# Altium PCB Pwr_PCB2.PcbDoc
Units mil, origin at the board's own origin, x right, y up, seen from the top; angles counter-clockwise.
Board outline 4800 x 4010 mil, 2 copper layers (Top Layer, Bottom Layer), stack 61.756 mil thick; 62 components, 21 nets, 142 pads, 19 vias.
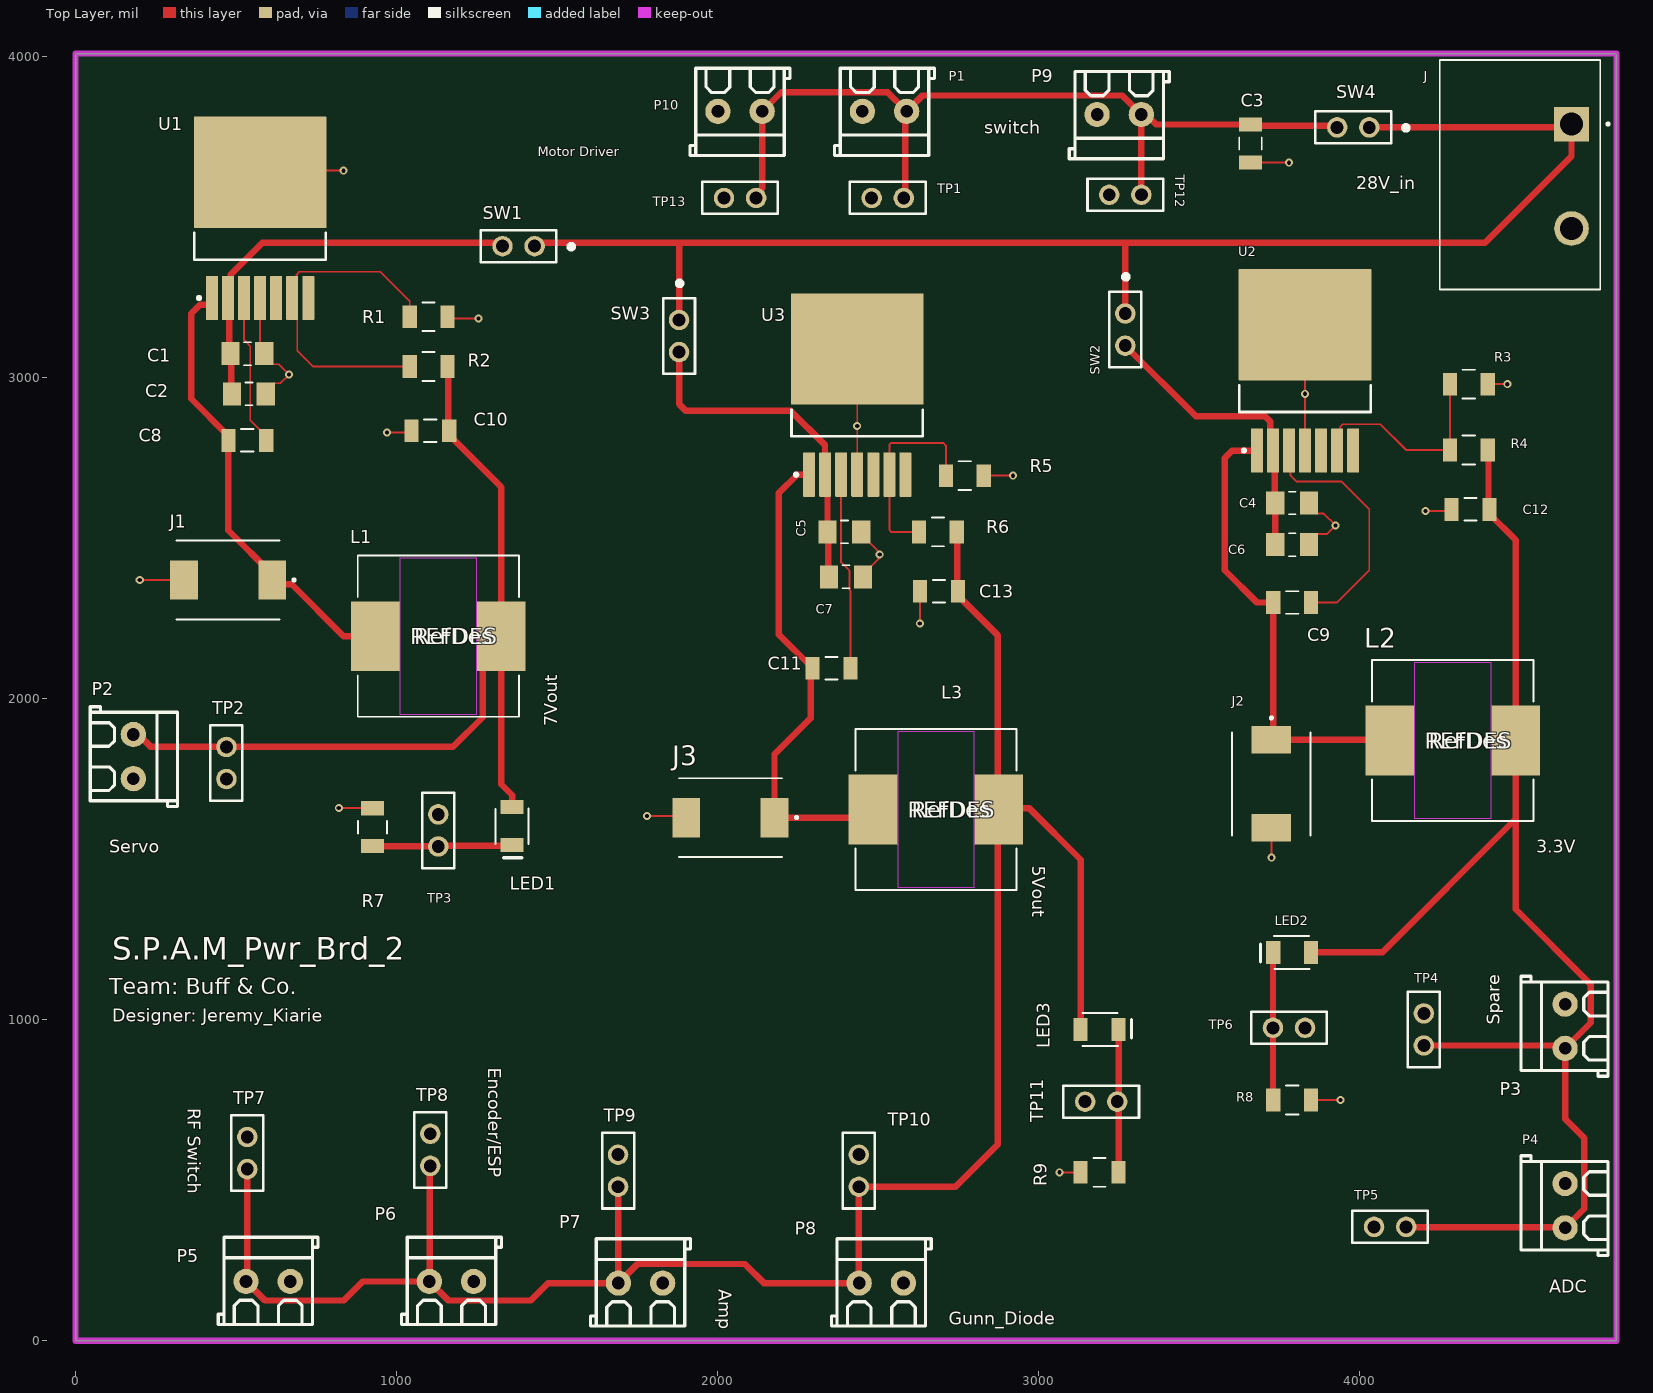
[diagram p0: Top Layer view]
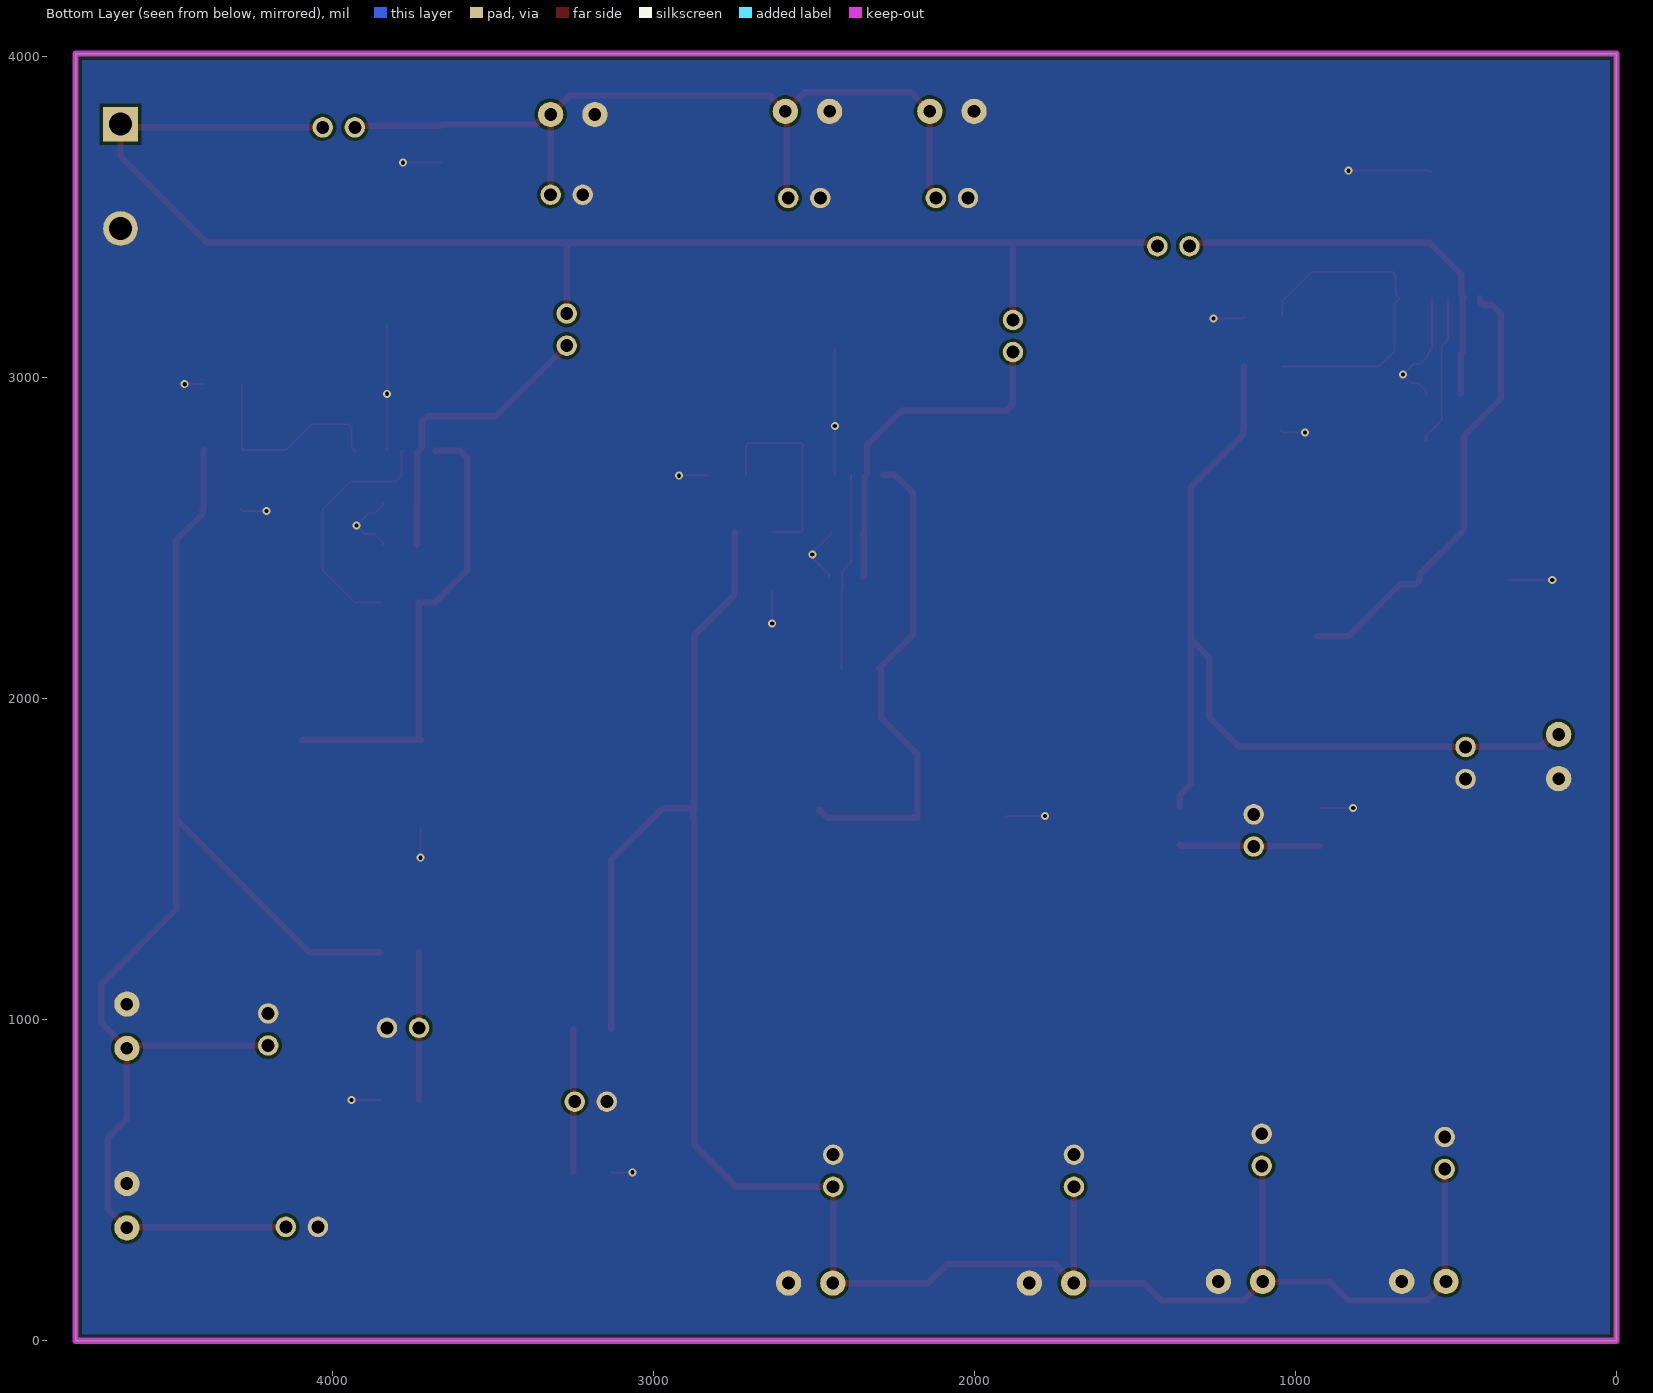
[diagram p1: Bottom Layer view, seen from below]
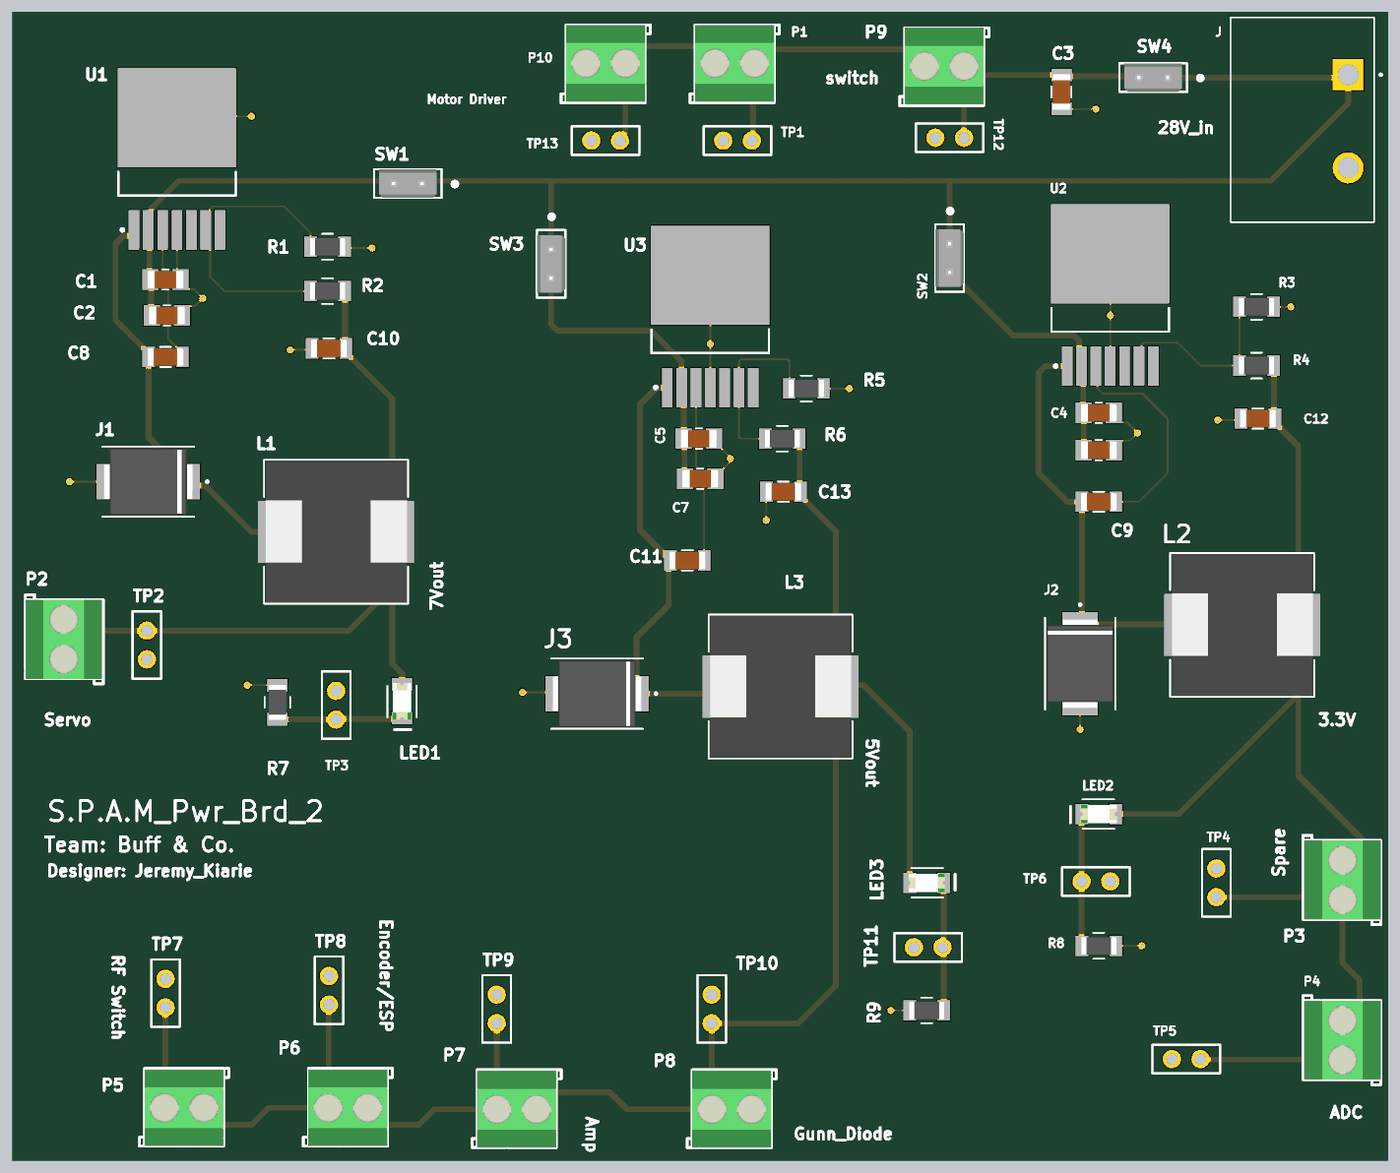
[diagram p2: 3D render of the assembled board from above, using the file's embedded part models]

## Layer stack, top to bottom
Top Solder: solder mask 1, SM-001, Dk 4
Top Layer: signal copper 1.378
Dielectric 1: core 59, Core-043, Dk 4.3
Bottom Layer: signal copper 1.378
Bottom Solder: solder mask 1, SM-001, Dk 4

## Board outline
0,0 4800,0 4800,4010 0,4010

## Design rules (kind name [scope] priority, off if disabled: settings)
Clearance [All] p1: gap=10 ignorepadtopadclearanceinfootprint=FALSE
PlaneClearance [All] p1: clearance=10
PlaneConnect [All] p1: planeconnectstyle=Direct reliefexpansion=20 reliefentries=4 reliefconductorwidth=10 reliefairgap=10
PolygonConnect [All] p1: connectstyle=Direct reliefconductorwidth=10 reliefentries=4 polygonreliefangle="90 Angle" airgapwidth=10
RoutingVias [All] p1: holewidth=13 width=25 viastyle="Through Hole" minholewidth=13 minwidth=25 maxholewidth=60 maxwidth=80
SolderMaskExpansion [All] p1: expansion=4 istentingtop=FALSE
SupplyNets "Schematic Supply Nets" [InNet('GND')] p1: voltage=0.000
UnRoutedNet [All] p1: checkbadconnections=TRUE
Width "Schematic Width Constraint_13" [InNet('NetLED1_2')] p1: maxlimit=100 minlimit=10 preferedwidth=20 minimp=50.000000 maximp=50.000000 favimp=50.000000
Width "Schematic Width Constraint_12" [InNet('NetLED3_2')] p2: maxlimit=100 minlimit=10 preferedwidth=20 minimp=50.000000 maximp=50.000000 favimp=50.000000
Width "Schematic Width Constraint_11" [InNet('NetLED2_2')] p3: maxlimit=100 minlimit=10 preferedwidth=20 minimp=50.000000 maximp=50.000000 favimp=50.000000
Width "Schematic Width Constraint_10" [InNet('NetC11_1')] p4: maxlimit=100 minlimit=10 preferedwidth=20 minimp=50.000000 maximp=50.000000 favimp=50.000000
Width "Schematic Width Constraint_9" [InNet('NetC8_1')] p5: maxlimit=100 minlimit=10 preferedwidth=20 minimp=50.000000 maximp=50.000000 favimp=50.000000
Width "Schematic Width Constraint_8" [InNet('NetC13_2')] p6: maxlimit=100 minlimit=10 preferedwidth=20 minimp=50.000000 maximp=50.000000 favimp=50.000000
Width "Schematic Width Constraint_7" [InNet('NetC12_2')] p7: maxlimit=100 minlimit=10 preferedwidth=20 minimp=50.000000 maximp=50.000000 favimp=50.000000
Width "Schematic Width Constraint_6" [InNet('NetC9_1')] p8: maxlimit=100 minlimit=10 preferedwidth=20 minimp=50.000000 maximp=50.000000 favimp=50.000000
Width "Schematic Width Constraint_5" [InNet('NetC10_2')] p9: maxlimit=100 minlimit=10 preferedwidth=20 minimp=50.000000 maximp=50.000000 favimp=50.000000
Width "Schematic Width Constraint" [InNet('NetC3_1')] p10: maxlimit=100 minlimit=10 preferedwidth=20 minimp=50.000000 maximp=50.000000 favimp=50.000000
Width "Schematic Width Constraint_4" [InNet('NetC4_2')] p11: maxlimit=100 minlimit=10 preferedwidth=20 minimp=50.000000 maximp=50.000000 favimp=50.000000
Width "Schematic Width Constraint_3" [InNet('+24V')] p12: maxlimit=100 minlimit=10 preferedwidth=20 minimp=50.000000 maximp=50.000000 favimp=50.000000
Width "Schematic Width Constraint_2" [InNet('NetC5_2')] p13: maxlimit=100 minlimit=10 preferedwidth=20 minimp=50.000000 maximp=50.000000 favimp=50.000000
Width "Schematic Width Constraint_1" [InNet('NetC1_2')] p14: maxlimit=100 minlimit=10 preferedwidth=20 minimp=50.000000 maximp=50.000000 favimp=50.000000
Width [All] p15: maxlimit=10 minlimit=6 preferedwidth=6 minimp=50.000000 maximp=50.000000 favimp=50.000000
27 further rules are at their usual default settings.

## Components (designator, comment, footprint, x,y, rotation, side; value= is the part's Value field where it differs from the comment)
C1 "C3216X5R1E336M160AC" CAPC3216X180N 535,3075 r180 top
C2 "C3216X5R1E336M160AC" CAPC3216X180N 540,2950 r180 top
C3 "22uF" 1206_Passive_Capacitor 3660,3730 r270 top
C4 "C3216X5R1E336M160AC" CAPC3216X180N 3790,2610 r180 top
C5 "C3216X5R1E336M160AC" CAPC3216X180N 2395,2520 r180 top
C6 "C3216X5R1E336M160AC" CAPC3216X180N 3790,2480 r180 top
C7 "C3216X5R1E336M160AC" CAPC3216X180N 2400,2380 r180 top
C8 "10nF" 1206_Passive_Capacitor 535,2805 r0 top
C9 "10nF" 1206_Passive_Capacitor 3790,2300 r0 top
C10 "22uF" 1206_Passive_Capacitor 1105,2835 r0 top
C11 "10nF" 1206_Passive_Capacitor 2355,2095 r0 top
C12 "22uF" 1206_Passive_Capacitor 4345,2590 r0 top
C13 "22uF" 1206_Passive_Capacitor 2690,2335 r0 top
J "4DB-P108-02" TE_2-1437667-4 4660,3790 r270 top
J1 "SL44-E3/57T" DIOM7959X262N 475,2370 r180 top
J2 "SL44-E3/57T" DIOM7959X262N 3725,1735 r270 top
J3 "SL44-E3/57T" DIOM7959X262N 2040,1630 r180 top
L1 "DR127-220-R" DR127 1130,2195 r0 top
L2 "DR127-220-R" DR127 4290,1870 r0 top
L3 "DR127-220-R" DR127 2680,1655 r0 top
LED1 "Red" LED_1206 1360,1604 r270 top
LED2 "Red" LED_1206 3790,1210 r180 top
LED3 "Red" LED_1206 3190,970 r0 top
P1 "2P Screw Terminal Block" "P_Terminal block 3.5mm-pitch" 2520,3830 r180 top
P2 "2P Screw Terminal Block" "P_Terminal block 3.5mm-pitch" 180,1820 r270 top
P3 "2P Screw Terminal Block" "P_Terminal block 3.5mm-pitch" 4640,980 r90 top
P4 "2P Screw Terminal Block" "P_Terminal block 3.5mm-pitch" 4640,421.1 r90 top
P5 "2P Screw Terminal Block" "P_Terminal block 3.5mm-pitch" 600,185 r0 top
P6 "2P Screw Terminal Block" "P_Terminal block 3.5mm-pitch" 1171.1,185 r0 top
P7 "2P Screw Terminal Block" "P_Terminal block 3.5mm-pitch" 1760,180 r0 top
P8 "2P Screw Terminal Block" "P_Terminal block 3.5mm-pitch" 2510,180 r0 top
P9 "2P Screw Terminal Block" "P_Terminal block 3.5mm-pitch" 3251.1,3820 r180 top
P10 "2P Screw Terminal Block" "P_Terminal block 3.5mm-pitch" 2070,3830 r180 top
R1 "1k" 1206_Passive_Resitor 1100,3190 r0 top value="1K Ohm"
R2 "1K" 1206_Passive_Resitor 1100,3035 r0 top value="4.75K Ohm"
R3 "1k" 1206_Passive_Resitor 4340,2980 r0 top value="1K Ohm"
R4 "1k" 1206_Passive_Resitor 4340,2775 r0 top value="1.72K Ohm"
R5 "1k" 1206_Passive_Resitor 2770,2695 r0 top value="1K Ohm"
R6 "1k" 1206_Passive_Resitor 2686,2520 r0 top value="3.16K Ohm"
R7 "1k" 1206_Passive_Resitor 925,1600 r90 top value="1K Ohm"
R8 "1k" 1206_Passive_Resitor 3790,750 r0 top value="1K Ohm"
R9 "1k" 1206_Passive_Resitor 3190,525 r180 top value="1K Ohm"
SW1 "SW_2Pin_100mil_Switch" 2Pin-Header-Conn 1430,3410 r180 top
SW2 "SW_2Pin_100mil_Switch" 2Pin-Header-Conn 3270,3200 r270 top
SW3 "SW_2Pin_100mil_Switch" 2Pin-Header-Conn 1880,3180 r270 top
SW4 "SW_2Pin_100mil_Switch" 2Pin-Header-Conn 4030,3780 r180 top
TP1 "10x Probe TP" TP_Diff_Probe 2580,3560 r180 top
TP2 "10x Probe TP" TP_Diff_Probe 470,1850 r270 top
TP3 "10x Probe TP" TP_Diff_Probe 1130,1540 r90 top
TP4 "10x Probe TP" TP_Diff_Probe 4200,920 r90 top
TP5 "10x Probe TP" TP_Diff_Probe 4145,355 r180 top
TP6 "10x Probe TP" TP_Diff_Probe 3730,975 r0 top
TP7 "10x Probe TP" TP_Diff_Probe 535,535 r90 top
TP8 "10x Probe TP" TP_Diff_Probe 1105,545 r90 top
TP9 "10x Probe TP" TP_Diff_Probe 1690,480 r90 top
TP10 "10x Probe TP" TP_Diff_Probe 2440,480 r90 top
TP11 "10x Probe TP" TP_Diff_Probe 3245,745 r180 top
TP12 "10x Probe TP" TP_Diff_Probe 3320,3570 r180 top
TP13 "10x Probe TP" TP_Diff_Probe 2120,3560 r180 top
U1 "LM2678S-ADJ/NOPB" KTW0007B_N 575,3496.3 r90 top
U2 "LM2678S-ADJ/NOPB" KTW0007B_N 3830,3021.3 r90 top
U3 "LM2678S-ADJ/NOPB" KTW0007B_N 2435,2946.3 r90 top

## Footprints (in the part's own frame and the unit in brackets; to place one, negate y for a bottom-side part, rotate by r counter-clockwise, add the part's x,y. Pads: shape width x height; smd on the part's side, far side on the other; paste and mask are expansions set on the pad)
2Pin-Header-Conn [mm]
  round 1.62 hole 1.02: 1(0,0) 2(2.54,0)
  silkscreen extent -3.03,-1.27 4.26,1.26, body extent -1.27,-1.27 3.81,1.27, height 8.13
1206_Passive_Capacitor [mil]
  rect 44x71 smd: 1(-59,0) 2(59,0)
  silkscreen extent -19,-35 19,35, body extent -63,-31 63,32, height 50
1206_Passive_Resitor [mil]
  rect 44x71 smd: 1(-59,0) 2(59,0)
  silkscreen extent -19,-45 19,45, body extent -61,-31 61,31, height 26
CAPC3216X180N [mm]
  rect 1.44x1.82 smd: 1(-1.336,0) 2(1.336,0)
  silkscreen extent -0.29,-0.9 0.29,0.9, body extent -1.6,-0.8 1.6,0.8, height 1.8
DIOM7959X262N [mm]
  rect 2.18x3.12 smd: A(3.485,0) C(-3.485,0)
  silkscreen extent -5.32,-3.11 4.07,3.11, body extent -3.97,-2.96 3.97,2.96, height 2.62
DR127 [mil]
  rect 152x217 smd paste+0 mask+0: 1(-196,0) 2(196,0)
  Top Layer keep-out region: -118,-244 -118,244 118,244 118,-244
  silkscreen extent -251,-251 251,251, body extent -245,-245 247,247, height 315
KTW0007B_N [mm] "DPAK, 7-Leads, Body 9.4x10.4mm, Pitch 1.27mm, IPC Medium Density"
  rrect11% 3.5x0.95 smd: 1(-6.3,3.81) 2(-6.3,2.54) 3(-6.3,1.27) 4(-6.3,0) 5(-6.3,-1.27) 6(-6.3,-2.54) 7(-6.3,-3.81)
  rrect1% 8.8x10.5 smd: 8(3.65,0)
  silkscreen extent -6.42,-5.2 -1.15,5.2, body extent -3.25,-5.2 6.15,5.2, height 4.65
LED_1206 [mil]
  rect 44x71 smd: 1(-59,0) 2(59,0)
  silkscreen extent -54,-51 99,51, body extent -63,-31 63,31, height 28
"P_Terminal block 3.5mm-pitch" [mm]
  round 2 hole 1: 1(-1.75,0) 2(1.75,0)
  silkscreen extent -3.95,-3.4 3.95,3.5, body extent -3.5,-3.4 3.5,3.4, height 8.4
TE_2-1437667-4 [mil]
  rect 108x108 hole 72: 1(0,0)
  round 108 hole 72: 2(325,0)
  silkscreen extent -200,-410 515,118
TP_Diff_Probe [mm]
  round 1.62 hole 1.02: 1(0,0) 2(2.54,0)
  silkscreen extent -1.72,-1.27 4.26,1.26

## Part data
C1 C2 C4 C5 C6 C7: "Cap Ceramic 33uF 25V X5R 20% Pad SMD 1206 85Â°C Low ESR T/R", Package="3216 TDK", Check_prices=https://www.snapeda.com/parts/C3216X5R1E336M160AC/TDK/view-part/?ref=eda, MF="TDK Electronics", MP=C3216X5R1E336M160AC, SnapEDA_Link=https://www.snapeda.com/parts/C3216X5R1E336M160AC/TDK/view-part/?ref=snap
C3 C10 C12 C13: library part C_22uF_1206, "22uF ±10% 25V X5R 1206 Multilayer Ceramic Capacitors MLCC - SMD/SMT RoHS", LCSC Part#=C12891, MFR Part #=CL31A226KAHNNNE, Datasheet=https://datasheet.lcsc.com/lcsc/1811031514_Samsung-Electro-Mechanics-CL31A226KAHNNNE_C12891.pdf, Type=basic
C8 C9 C11: library part C_10nF_1206, "10nF 50V X7R ±10% 1206 Multilayer Ceramic Capacitors MLCC - SMD/SMT ROHS", LCSC Part#=C1848, MFR Part #=CL31B105KBHNNNE, Digikey Link=https://www.digikey.com/product-detail/en/C1206C105M4RACTU/399-8150-1-ND/3471873/?itemSeq=304982366, Type=Basic
J: "Conn; Term Strip; Barrier; 2Pole; 8.26mmPitch; SnglRow; 22-12; Series 4DB; 20A; 150V", Package=None, Availability=Unavailable, MF="TE Connectivity", MP=4DB-P108-02, Price=None, SnapEDA_Link=https://www.snapeda.com/parts/4DB-P108-02/TE%20Connectivity%20AMP%20Connectors/view-part/2743721/?ref=snap, TE_purchase_URL=https://www.te.com/usa-en/product-2-1437667-4.html?te_bu=Cor&te_type=disp&te_campaign=seda_glo_cor-seda-global-disp-prtnr-fy19-seda-model-bom-cta_sma-317_1&elqCampaignId=32493
J1 J2 J3: "Diode Schottky 40 V 4A Surface Mount DO-214AB (SMC)", Package="DO-214 Vishay", Check_prices=https://www.snapeda.com/parts/SL44-E3/57T/Vishay/view-part/?ref=eda, MF="Vishay Semiconductor", MP=SL44-E3/57T, SnapEDA_Link=https://www.snapeda.com/parts/SL44-E3/57T/Vishay/view-part/?ref=snap
L1 L2 L3: "Description", Manufacturer_Name=Eaton, Copyright="Copyright (C) 2025 Ultra Librarian. All rights reserved.", Manufacturer_Part_Number=DR127-220-R
LED1 LED2 LED3: library part LED_RED_1206, "Red 621~631nm 1206 Light Emitting Diodes (LED) RoHS", LCSC Part#=C93133, MFR Part #=15-21/R6C-FQ1R1B/2T, Datasheet=https://datasheet.lcsc.com/szlcsc/1811151241_Everlight-Elec-15-21-R6C-FQ1R1B-2T_C93133.pdf, Type=Extended
P1 P2 P3 P4 P5 P6 P7 P8 P9 P10: library part "P_Terminal block", "Green Straight pin 3.5mm  pitch; P=3.5mm  Screw terminal ROHS", LCSC Part#=C474892, Manufacturer="Cixi Kefa Elec", MFR Part #=KF350-3.5-2P, Datasheet=https://datasheet.lcsc.com/lcsc/2001160007_Cixi-Kefa-Elec-KF350-3-5-2P_C474892.pdf
R1 R2 R3 R4 R5 R6 R7 R8 R9: library part R_1K_1206, "CHIP RESISTOR - SURFACE MOUNT 1KOHMS ±1% 1/4W 1206 ROHS", LCSC Part#=C4410, MFR Part #=RNCP1206FTD1K00CT, Digikey Link=https://www.digikey.com/product-detail/en/RNCP1206FTD1K00/RNCP1206FTD1K00CT-ND/2240675/?itemSeq=304982373, Type=Basic
SW1 SW2 SW3 SW4: "2Pin Header", LCSC Part#=C124375, Type=Extended
TP1 TP2 TP3 TP4 TP5 TP6 TP7 TP8 TP9 TP10 TP11 TP12 TP13: library part TP_Diff_Probe, "Test Point 300 mil centers"
U1 U2 U3: library part CMP-0069-00191-3, "SIMPLE SWITCHER® High Efficiency 5A Step-Down Voltage Regulator, 7-pin TO-263, Pb-Free", Manufacturer="Texas Instruments", PackageTopMarking=NSUZXYTTE#*LM2678*S-ADJ, PowerWise=N, Code_JEDEC=MO-169-AC, ComponentLink1Description="Datasheet URL", ComponentLink1URL=http://www.ti.com/general/docs/lit/getliterature.tsp?genericPartNumber=LM2678&fileType=pdf, CompType=Switcher, PackageDescription="TO-263, Molded, .400 x .390 x .180in Body, 7 Lead, .050in Pitch, Surface Mount", PackageReference=KTW0007B, PinCount=7, RoHS=Y

## Via types
v1: diameter 25, hole 13, Top Layer to Bottom Layer, 19 vias

## Nets (pads, with @x,y where several pads share a name; then routed paths per layer and width w, separated by ;. In a path a pad name is that pad's centre, name@x,y a point inside that pad or via, vN(x,y) a via of type N, cw(c..) or ccw(c..) an arc to the next point about the centre after c; other vN are vias at no path point)
+24V: J.1 SW1.1 SW2.1 SW3.1 SW4.1 | length 4536
  Top Layer w20: SW1.1@1430,3420 1880,3420 ; SW3.1 1880,3420 ; SW2.1 3270,3420 ; SW4.1 4650,3780 J.1 4660,3690 4390,3420 3270,3420 ; 1880,3420 3270,3420
GND: C1.1 C2.1 C3.2 C4.1 C5.1 C6.1 C7.1 C10.1 C12.1 C13.1 J1.A J2.A J3.A J.2 P1.2 P2.2 P3.2 P4.2 P5.2 P6.2 P7.2 P8.2 P9.2 P10.2 R1.2 R3.2 R5.2 R7.2 R8.2 R9.2 TP1.2 TP2.2 TP3.2 TP4.2 TP5.2 TP6.2 TP7.2 TP8.2 TP9.2 TP10.2 TP11.2 TP12.2 TP13.2 U1.4 U1.8 U2.4 U2.8 U3.4 U3.8 | length 3097.3
  Top Layer w6: v1(200,2370) J1.A ; U1.4 575,3087.6 C1.1 587.6,3067.52 612.94,3042.17 632.83,3042.17 v1(665,3010) 637.83,2982.83 617.94,2982.83 592.6,2957.48 C2.1 ; U1.8 580,3645 v1(835,3645) ; v1(820,1660) 924,1660 R7.2 ; v1(970,2830) 1041,2830 C10.1 ; R1.2 1164,3185 v1(1255,3185) ; v1(1780,1635) 1897.8,1635 J3.A ; U3.4 v1(2435,2850) U3.8 ; C5.1 2447.6,2512.52 2505,2455.12 v1(2505,2450) 2501.36,2446.36 2501.36,2436.25 2452.6,2387.48 C7.1 ; v1(2630,2235) 2630,2334 C13.1 ; R5.2 v1(2920,2695) ; v1(3065,525) R9.2 ; C3.2 3660.64,3670.36 v1@3779.36,3670.36 ; v1(3725,1505) J2.A ; v1@3779.36,3669.36 v1(3780,3670) ; U2.4 v1(3830,2950) U2.8 ; C6.1 3842.6,2487.48 3867.94,2512.83 3897.83,2512.83 v1(3925,2540) 3887.83,2577.17 3867.94,2577.17 3842.6,2602.52 C4.1 ; R8.2 v1(3940,750) ; v1(4205,2585) 4281,2585 C12.1 ; R3.2 v1(4460,2980)
NetC1_2: C1.2 C2.2 SW1.2 U1.2 | length 1267.4
  Top Layer w20: C2.2 484.9,2952.5 484.9,3072.5 C1.2 478.7,3078.7 478.7,3244.57 U1.2 483.7,3256.97 483.7,3321.65 582.06,3420 SW1.2@1330,3420
NetC3_1: C3.1 P1.1 P9.1 P10.1 SW4.2 TP1.1 TP12.1 TP13.1 | length 2703.4
  Top Layer w20: TP13.1 2120,3571.85 2138.9,3590.74 P10.1 2198.27,3889.37 2529.53,3889.37 P1.1 ; TP1.1 2584.45,3564.45 2584.45,3825.55 P1.1 ; TP12.1 P9.1 ; SW4.2 3925.5,3784.5 3664.5,3784.5 C3.1 3366.9,3789 3335.9,3820 P9.1 ; P1.1 2638.27,3879.37 3260.63,3879.37 P9.1
NetC4_2: C4.2 C6.2 SW2.2 U2.2 | length 939.5
  Top Layer w20: SW2.2 3490,2880 3705,2880 3721.3,2863.7 3721.3,2781.97 U2.2 3735.84,2767.43 3735.84,2611.56 C4.2 C6.2
NetC5_2: C5.2 C7.2 SW3.2 U3.2 | length 1084
  Top Layer w20: SW3.2 1880,2918.49 1901.72,2896.77 2228.23,2896.77 2334.61,2790.39 U3.2@2334.61,2698.66 ; U3.2@2335.26,2698.01 2342.4,2690.87 C5.2 2344.9,2517.5 2344.9,2382.5 C7.2
NetC8_1: C8.1 J1.C L1.1 U1.1 | length 1411.3
  Top Layer w20: U1.1 425,3236.72 416.3,3228.02 388.02,3228.02 360,3200 360,2934.5 476,2818.5 C8.1 476,2524.71 612.2,2388.5 J1.C@612.2,2379.25 ; J1.C 625.61,2356.6 673.4,2356.6 835,2195 L1.1
NetC8_2: C8.2 U1.3 | length 471.8
  Top Layer w6: U1.3 525,3117.79 544.25,3098.54 544.25,2868.25 C8.2@594,2818.5
  Top Layer w10: C8.2 C8.2@594,2818.5
NetC9_1: C9.1 J2.C L2.1 U2.1 | length 1452.3
  Top Layer w20: U2.1 3603.27,2773.27 3580,2750 3580,2400 3680,2300 C9.1 3731,1878.2 J2.C 4091.8,1872.2 L2.1
NetC9_2: C9.2 U2.3 | length 781.3
  Top Layer w6: U2.3@3784.77,2768.5 3784.77,2695.23 3803,2677 3943,2677 4030,2590 4030,2400 3930,2300 C9.2
  Top Layer w10: U2.3 U2.3@3784.77,2768.5
NetC10_2: C10.2 L1.2 LED1.1 P2.1 R2.2 TP2.1 | length 2856.6
  Top Layer w20: P2.1 195.89,1888.9 234.79,1850 TP2.1 1175.28,1850 1268,1942.72 1268,2128 L1.2@1320,2180 ; R2.2 1161.5,3032.5 1161.5,2837.5 C10.2 1164,2821.5 1326,2659.5 L1.2 1326,2180 1326,1734 1360,1700 LED1.1
NetC11_1: C11.1 J3.C L3.1 U3.1 | length 1539.4
  Top Layer w20: U3.1 2284.75,2698.01 2248.01,2698.01 2190,2640 2190,2201 C11.1 2290,2089 2290,1940 2177.2,1827.2 J3.C 2459,1630 L3.1
NetC11_2: C11.2 U3.3 | length 615.3
  Top Layer w6: U3.3 2385,2424.96 2411.25,2398.71 2411.25,2338.79 2414,2336.04 C11.2
NetC12_2: C12.2 L2.2 LED2.1 P3.1 P4.1 R4.2 TP4.1 TP5.1 | length 4378.7
  Top Layer w20: LED2.1 4070,1210 4480,1620 ; TP5.1 4146.4,353.6 4638.6,353.6 P4.1 4699.37,411.58 4699.37,631.65 4640,691.02 P3.1 ; TP4.1 4631.1,920 P3.1 ; R4.2 4401.5,2772.5 4401.5,2592.5 C12.2 4404,2576.5 4486,2494.5 L2.2 4486,1344 4720,1110 4720,991.1 P3.1
NetC13_2: C13.2 L3.2 LED3.1 P5.1 P6.1 P7.1 P8.1 R6.2 TP7.1 TP8.1 TP9.1 TP10.1 | length 6666.7
  Top Layer w20: TP7.1 535,188.9 P5.1 590.47,125.63 835.62,125.63 894.99,185 P6.1 1161.57,125.63 1418.12,125.63 1472.49,180 P7.1 1750.47,239.37 2085.07,239.37 2144.44,180 P8.1 ; P6.1@1103.6,186.4 TP8.1@1103.6,545 ; P7.1@1690.55,180.55 TP9.1@1690.55,480 ; P8.1@2440,181.1 TP10.1 2741.1,480 2873.27,612.17 L3.2@2873.27,1627.54 ; R6.2 2747,2518 2747,2337 C13.2 2749,2321.5 2873.27,2197.23 2873.27,1657.73 L3.2 ; L3.2@2876,1627.54 L3.2 ; LED3.1 3131,1499 2970.28,1659.72 2880.72,1659.72 L3.2
NetLED1_2: LED1.2 R7.1 TP3.1 | length 437.5
  Top Layer w20: R7.1 925.5,1540.5 1129.5,1540.5 TP3.1 1132.5,1542.5 1357.5,1542.5 LED1.2
NetLED2_2: LED2.2 R8.1 TP6.1 | length 460
  Top Layer w20: R8.1@3730,750 TP6.1 LED2.2@3730,1210
NetLED3_2: LED3.2 R9.1 TP11.1 | length 436.5
  Top Layer w20: TP11.1@3245,733.15 3249,729.15 R9.1 ; TP11.1 3249,749 LED3.2
NetR1_1: R1.1 R2.1 U1.6 | length 1062.6
  Top Layer w6: R2.1 740,3035 690.7,3084.3 690.7,3232.57 U1.6 688.9,3262.17 688.9,3321.49 697.58,3330.17 949.83,3330.17 1041,3239 R1.1
NetR3_1: R3.1 R4.1 U2.6 | length 661.2
  Top Layer w6: U2.6@3939.57,2782.83 3939.57,2847.79 3946.94,2855.17 4064.83,2855.17 4145,2775 R4.1 R3.1
  Top Layer w10: U2.6 U2.6@3939.57,2782.83
NetR5_1: R5.1 R6.1 U3.6 | length 635.9
  Top Layer w6: U3.6@2534.9,2698.17 2534.9,2525.86 2540.76,2520 R6.1 ; U3.6 2535,2791.47 2540.86,2797.33 2702.67,2797.33 2711,2789 R5.1
pads on no net: U1.5 U1.7 U2.5 U2.7 U3.5 U3.7

## Polygon pours and split planes (outlines as drawn)
GND on Bottom Layer "GND_L02_P000" (solid, pour order 0): 0,4010 4800,4010 4800,0 0,0

## Keep-outs
Keep-Out Layer:
  lines w20: 0,0 0,3900 0,4010 790,4010 1070,4010 1200,4010 3389,4010 4800,4010 4800,0 0,0

## Silkscreen, mask and mechanical layers (free items; w line width, h text height)
Top Overlay:
  text "switch" at 2830,3760 h40
  text "Motor Driver" at 1440,3690 h30
  text "28V_in" at 3990,3586.66 h40
  text "7Vout" at 1500,1915 h40 r90
  text "Servo" at 105,1520 h40
  text "3.3V" at 4550,1520 h40
  text "5Vout" at 2980,1480 h40 r270
  text "S.P.A.M_Pwr_Brd_2" at 115,1186.66 h70
  text "Team: Buff & Co." at 105,1080 h50
  text "Designer: Jeremy_Kiarie" at 115,993.33 h40
  text "Spare" at 4436.67,985 h40 r90
  text "Encoder/ESP" at 1285,850 h40 r270
  text "RF Switch" at 350,725 h40 r270
  text "Amp" at 2003.33,160 h40 r270
  text "ADC" at 4590,150 h40
  text "Gunn_Diode" at 2720,50 h40 r0.1

## Text inside footprints (layer, text, board x,y; h text height)
L1: Top Overlay "RefDes" at 1055,2170 h50; Top Overlay "REFDES" at 1042.5,2170 h50; Mechanical 13 "RefDes2" at 1042.5,2170 h50
L2: Top Overlay "RefDes" at 4215,1845 h50; Top Overlay "REFDES" at 4202.5,1845 h50; Mechanical 13 "RefDes2" at 4202.5,1845 h50
L3: Top Overlay "RefDes" at 2605,1630 h50; Top Overlay "REFDES" at 2592.5,1630 h50; Mechanical 13 "RefDes2" at 2592.5,1630 h50